# EAGLE board Clock Schematic v.6_one_layer (EAGLE 9.3.0)
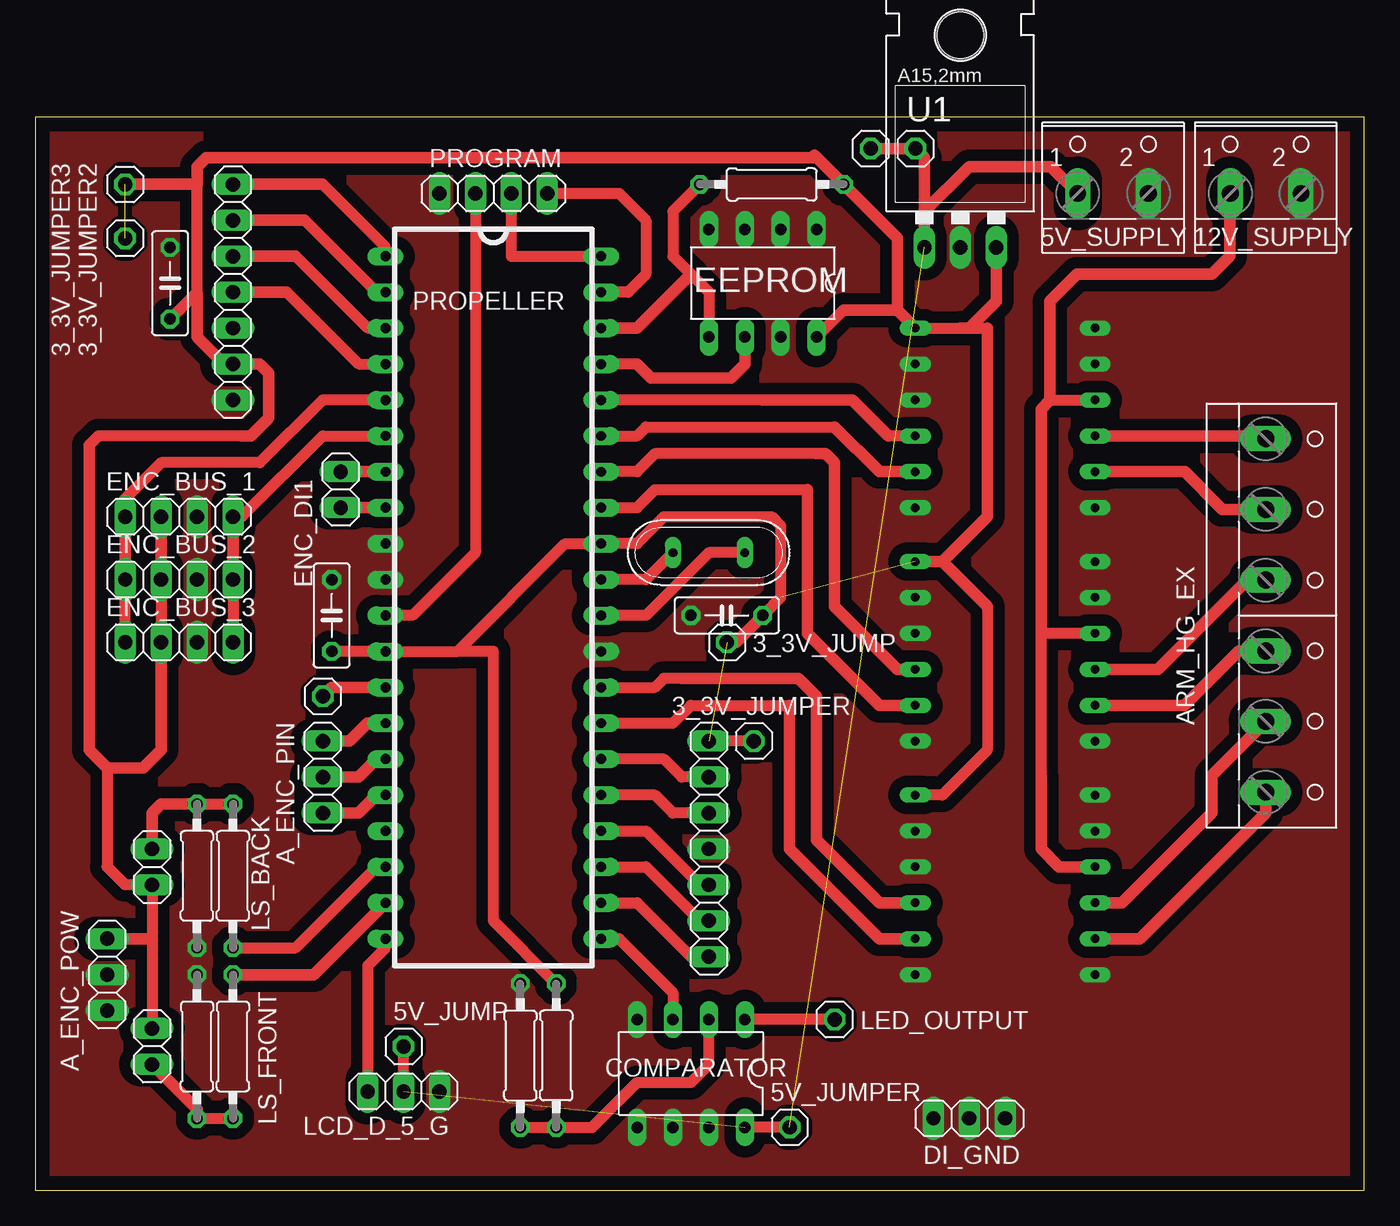
[diagram p0: board, top side]
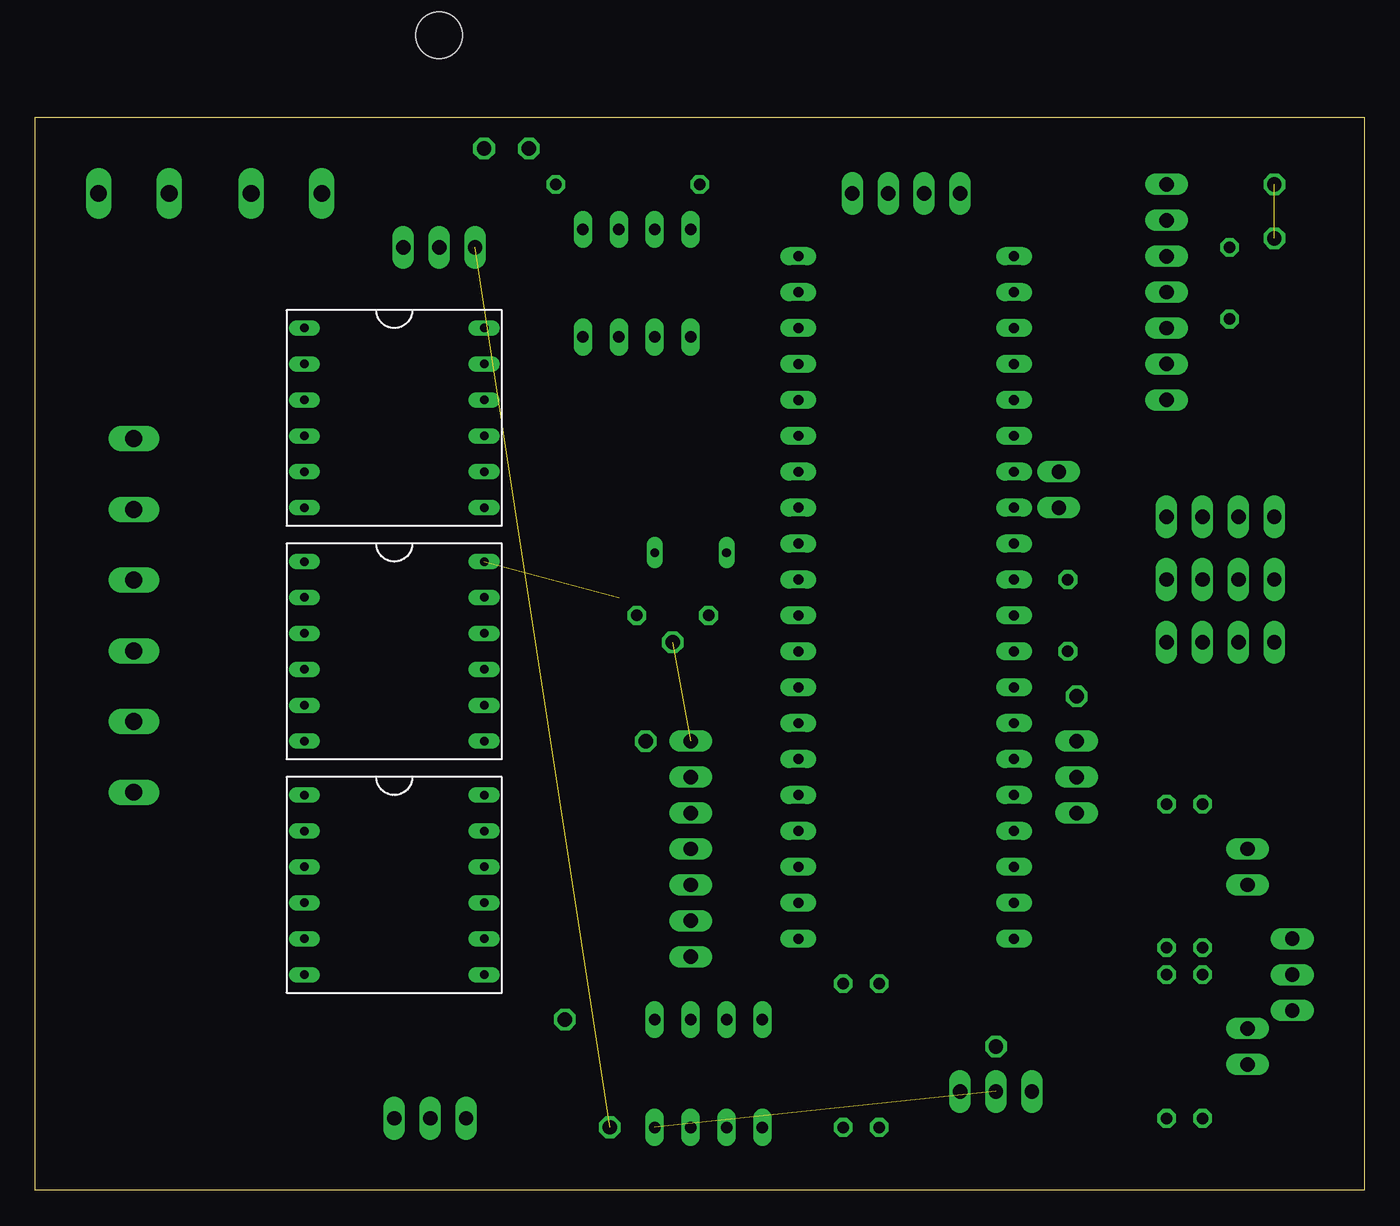
[diagram p1: board, bottom side, seen from below]

Size 93.96 x 75.87 mm. Coordinates in mm from the lower left corner, seen from the top.
Outline: 0,0 93.96,0 93.96,75.87 0,75.87 0,0
Copper layers (1*16): Top 0.035mm / dielectric 1.5mm / Bottom 0.035mm
Design rules "default *": minimum track width 6mil, minimum drill 0.35mm, track to track 30mil, track to pad 6mil, pad to pad 6mil, via to via 6mil, smd to smd 6mil, copper to edge 40mil, drill to drill 6mil, minimum pad ring 10mil, minimum via ring 8mil, stop-mask expansion 4mil, vias tented up to drill 0mil, thermal gap 10mil

## Footprints (pad centres in the part's own frame; a part is rotated, then mirrored left to right if it is on the bottom)
1X01 = drill 1.016 octagon: 1 0,0
W237-102 = drill 1.194 long: 1 -2.5,-1.27; 2 2.5,-1.27
1X03 = drill 1.016 long: 1 -2.54,0; 2 0,0; 3 2.54,0
DRV = drill 0.6 long: P$1 1.27,1.27; P$2 1.27,3.81; P$3 1.27,6.35; P$4 1.27,8.89; P$5 1.27,11.43; P$6 1.27,13.97; P$7 13.97,13.97; P$8 13.97,11.43; P$9 13.97,8.89; P$10 13.97,6.35; P$11 13.97,3.81; P$12 13.97,1.27
W237-6 = drill 1.194 long: 1 -12.5,-1.27; 2 -7.5,-1.27; 3 -2.5,-1.27; 4 2.5,-1.27; 5 7.5,-1.27; 6 12.5,-1.27
C050-025X075 = drill 0.813 octagon: 1 -2.54,0; 2 2.54,0
DIL08 = drill 0.813 long: 1 -3.81,-3.81; 2 -1.27,-3.81; 3 1.27,-3.81; 4 3.81,-3.81; 5 3.81,3.81; 6 1.27,3.81; 7 -1.27,3.81; 8 -3.81,3.81
DIL8 = drill 0.813 long: 1 -3.81,-3.81; 2 -1.27,-3.81; 3 1.27,-3.81; 4 3.81,-3.81; 5 3.81,3.81; 6 1.27,3.81; 7 -1.27,3.81; 8 -3.81,3.81
1X04 = drill 1.016 long: 1 -3.81,0; 2 -1.27,0; 3 1.27,0; 4 3.81,0
1X02 = drill 1.016 long: 1 -1.27,0; 2 1.27,0
1X07 = drill 1.016 long: 1 -7.62,0; 2 -5.08,0; 3 -2.54,0; 4 0,0; 5 2.54,0; 6 5.08,0; 7 7.62,0
P8X32A-D40 = drill 0.7 pad 1.27 long: 1 -7.62,23.495; 2 -7.62,20.955; 3 -7.62,18.415; 4 -7.62,15.875; 5 -7.62,13.335; 6 -7.62,10.795; 7 -7.62,8.255; 8 -7.62,5.715; 9 -7.62,3.175; 10 -7.62,0.635; 11 -7.62,-1.905; 12 -7.62,-4.445; 13 -7.62,-6.985; 14 -7.62,-9.525; 15 -7.62,-12.065; 16 -7.62,-14.605; 17 -7.62,-17.145; 18 -7.62,-19.685; 19 -7.62,-22.225; 20 -7.62,-24.765; 21 7.62,-24.765; 22 7.62,-22.225; 23 7.62,-19.685; 24 7.62,-17.145; 25 7.62,-14.605; 26 7.62,-12.065; 27 7.62,-9.525; 28 7.62,-6.985; 29 7.62,-4.445; 30 7.62,-1.905; 31 7.62,0.635; 32 7.62,3.175; 33 7.62,5.715; 34 7.62,8.255; 35 7.62,10.795; 36 7.62,13.335; 37 7.62,15.875; 38 7.62,18.415; 39 7.62,20.955; 40 7.62,23.495
QS = drill 0.61 long: 1 -2.54,0; 2 2.54,0
0207/10 = drill 0.813 octagon: 1 -5.08,0; 2 5.08,0
78XXL = drill 1.016 long: GND 0,-3.81; IN -2.54,-3.81; OUT 2.54,-3.81 | hole 3.302: 0,11.176

## Placement (x,y rotation side)
3_3V_JUMP  [1X01]  48.9,38.73 0 top
3_3V_JUMPER  [1X01]  50.8,31.75 0 top
3_3V_JUMPER2  [1X01]  6.35,67.31 0 top
3_3V_JUMPER3  [1X01]  6.35,71.12 0 top
5V_JUMP  [1X01]  26.04,10.16 0 top
5V_JUMPER  [1X01]  53.34,4.45 0 top
5V_JUMPER2  [1X01]  59.05,73.66 0 top
5V_JUMPER3  [1X01]  62.23,73.66 0 top
5V_SUPPLY  [W237-102]  76.2,71.75 0 top
12V_SUPPLY  [W237-102]  87,71.75 0 top
A_ENC_PIN  [1X03]  20.32,29.21 270 top
A_ENC_POW  [1X03]  5.08,15.24 270 top
ARM  DRV  [DRV]  76.2,13.97 0 bottom
ARM_HG_EX  [W237-6]  88.27,40.64 270 top
C1  0.1uF  [C050-025X075]  9.53,64.14 90 top
C2  [C050-025X075]  48.9,40.64 180 top
C3  [C050-025X075]  20.95,40.64 90 top
COMPARATOR  MAX907CPA  [DIL08]  46.35,8.26 180 top
DI_GND  [1X03]  66.04,5.08 0 top
EEPROM  24LC256P  [DIL8]  51.44,64.14 180 top
ENC_BUS_1  [1X04]  10.16,47.62 0 top
ENC_BUS_2  [1X04]  10.16,43.18 0 top
ENC_BUS_3  [1X04]  10.16,38.73 0 top
ENC_DI1  [1X02]  21.59,49.53 270 top
EXTEND  DRV  [DRV]  76.2,46.99 0 bottom
HG  DRV  [DRV]  76.2,30.48 0 bottom
JP1  [1X07]  13.97,63.5 270 top
JP3  [1X01]  20.32,34.92 0 top
JS  [1X07]  47.62,24.13 270 top
LCD_D_5_G  [1X03]  26.04,6.99 180 top
LED_OUTPUT  [1X01]  56.52,12.06 0 top
LS_BACK  [1X02]  8.26,22.86 90 top
LS_FRONT  [1X02]  8.26,10.16 270 top
PROGRAM  [1X04]  32.38,70.48 0 top
PROPELLER  P8X32A-D40  [P8X32A-D40]  32.38,42.55 0 top
Q1  [QS]  47.62,45.09 180 top
R1  [0207/10]  36.83,9.53 90 top
R2  [0207/10]  34.29,9.53 270 top
R3  10k  [0207/10]  11.43,10.16 270 top
R4  470  [0207/10]  13.97,10.16 270 top
R5  10k  [0207/10]  11.43,22.23 90 top
R6  470  [0207/10]  13.97,22.23 90 top
R7  10k  [0207/10]  52.07,71.12 0 top
U1  [78XXL]  65.41,70.48 0 top

## Library data of the parts
3_3V_JUMP 3_3V_JUMPER 3_3V_JUMPER2 3_3V_JUMPER3 5V_JUMP 5V_JUMPER 5V_JUMPER2 5V_JUMPER3 A_ENC_PIN A_ENC_POW DI_GND ENC_BUS_1-ENC_BUS_3 ENC_DI1 JP1 JP3 JS LCD_D_5_G LED_OUTPUT LS_BACK LS_FRONT PROGRAM = pinhead
5V_SUPPLY 12V_SUPPLY = con-wago-500; MPN: 237-102; OC_FARNELL: unknown; OC_NEWARK: 70K9898
ARM EXTEND HG = Pololu_DRV8801_Breakout
ARM_HG_EX = con-wago-500; OC_FARNELL: unknown; OC_NEWARK: unknown
C1-C3 = rcl; SPICEPREFIX: C
COMPARATOR = maxim; MF: MAXIM; MPN: MAX907CPA; OC_FARNELL: unknown; OC_NEWARK: 79C3004; SPICEPREFIX: X
EEPROM = microchip; MF: MICROCHIP; MPN: 24LC256-E/P; OC_FARNELL: 9757970; OC_NEWARK: 92C7169
PROPELLER = parallax_propeller
Q1 = special
R1-R7 = rcl; SPICEPREFIX: R
U1 = SparkFun-IC-Power

## Nets
+3V3: 3_3V_JUMP.1 3_3V_JUMPER2.1 3_3V_JUMPER3.1 3_3V_JUMPER.1 A_ENC_POW.1 ARM.P$7 C1.1 C2.1 C3.1 EEPROM.8 ENC_BUS_1.2 ENC_BUS_2.2 ENC_BUS_3.2 EXTEND.P$7 HG.P$7 JP1.6 JS.1 LS_BACK.1 LS_FRONT.1 PROPELLER.12 PROPELLER.32 R1.2 R7.2 U1.OUT
+5V: 5V_JUMP.1 5V_JUMPER2.1 5V_JUMPER3.1 5V_JUMPER.1 5V_SUPPLY.1 COMPARATOR.8 LCD_D_5_G.2 U1.IN
+12V: 12V_SUPPLY.1 ARM.P$4 EXTEND.P$4 HG.P$4
ENC_CLK: ENC_BUS_1.4 ENC_BUS_2.4 ENC_BUS_3.4 PROPELLER.6
ENC_CS: ENC_BUS_1.1 ENC_BUS_2.1 ENC_BUS_3.1 PROPELLER.5
GND: 5V_SUPPLY.2 12V_SUPPLY.2 A_ENC_POW.2 A_ENC_POW.3 ARM.P$1 ARM.P$5 ARM.P$6 ARM.P$8 ARM.P$9 ARM.P$12 C1.2 C2.2 C3.2 COMPARATOR.4 COMPARATOR.5 COMPARATOR.6 COMPARATOR.7 DI_GND.1 DI_GND.2 DI_GND.3 EEPROM.1 EEPROM.2 EEPROM.3 EEPROM.4 EEPROM.7 ENC_BUS_1.3 ENC_BUS_2.3 ENC_BUS_3.3 EXTEND.P$1 EXTEND.P$5 EXTEND.P$6 EXTEND.P$8 EXTEND.P$9 EXTEND.P$12 HG.P$1 HG.P$5 HG.P$6 HG.P$8 HG.P$9 HG.P$12 JP1.7 JS.4 LCD_D_5_G.1 PROGRAM.1 PROPELLER.9 PROPELLER.10 PROPELLER.29 R2.1 R3.1 R5.1 U1.GND
N$1: ENC_DI1.1 PROPELLER.7
N$2: JS.5 PROPELLER.24
N$3: JS.6 PROPELLER.23
N$4: JS.7 PROPELLER.22
N$5: JS.3 PROPELLER.25
N$6: JS.2 PROPELLER.26
N$7: LCD_D_5_G.3 PROPELLER.20
N$8: ENC_DI1.2 PROPELLER.8
N$9: COMPARATOR.1 LED_OUTPUT.1
N$10: PROPELLER.31 Q1.2
N$11: COMPARATOR.2 R1.1 R2.2
N$12: PROPELLER.30 Q1.1
N$13: PROPELLER.19 R4.1
N$14: LS_BACK.2 R5.2 R6.2
N$15: PROPELLER.18 R6.1
N$16: EEPROM.6 PROPELLER.37
N$17: ARM.P$11 PROPELLER.27
N$18: PROGRAM.4 PROPELLER.39
N$19: PROGRAM.3 PROPELLER.40
N$20: EEPROM.5 PROPELLER.38 R7.1
N$21: COMPARATOR.3 PROPELLER.21
N$22: ARM.P$10 PROPELLER.28
N$23: HG.P$11 PROPELLER.33
N$24: HG.P$10 PROPELLER.34
N$25: EXTEND.P$11 PROPELLER.35
N$26: PROGRAM.2 PROPELLER.11
N$27: LS_FRONT.2 R3.2 R4.2
N$28: EXTEND.P$10 PROPELLER.36
N$29: ARM_HG_EX.1 EXTEND.P$3
N$30: ARM_HG_EX.2 EXTEND.P$2
N$31: ARM_HG_EX.3 HG.P$3
N$32: ARM_HG_EX.4 HG.P$2
N$33: ARM.P$3 ARM_HG_EX.5
N$34: ARM.P$2 ARM_HG_EX.6
N$35: JP3.1 PROPELLER.13
N$36: A_ENC_PIN.1 PROPELLER.14
N$37: A_ENC_PIN.2 PROPELLER.15
N$38: A_ENC_PIN.3 PROPELLER.16
RTC_CLK: JP1.4 PROPELLER.4
RTC_CS: JP1.1 PROPELLER.1
RTC_SI: JP1.2 PROPELLER.2
RTC_SO: JP1.3 PROPELLER.3

## Tracks (layer width: path | path; a pad name or v marks a point on that pad's centre or on a via)
+3V3  (3 unrouted)
  Top 0.762: C3.1 PROPELLER.12 29.84,38.1 | EXTEND.P$7 65.41,60.96 67.31,60.96 | 67.31,41.27 67.31,31.11 64.14,27.94 ARM.P$7 | LS_FRONT.1 8.26,17.78 LS_BACK.1 6.35,21.59 5.08,22.86 5.08,29.84 | 29.84,38.1 37.47,45.72 PROPELLER.32 42.55,45.72 44.45,47.62 52.07,47.62 52.7,46.99 52.7,41.91 C2.1 | 11.43,63.5 11.43,62.87 | 11.43,63.5 11.43,71.12 | C1.1 11.43,63.5 | 14.61,53.34 4.45,53.34 3.81,52.7 | R1.2 32.38,19.05 32.38,38.1 29.84,38.1 | 3_3V_JUMPER.1 JS.1 | EEPROM.8 57.15,62.23 | ENC_BUS_2.2 ENC_BUS_3.2
  Top 0.813: HG.P$7 64.14,44.45 | 64.14,44.45 67.31,41.27 | 67.31,60.96 67.31,47.62 64.14,44.45 | U1.OUT 67.94,62.87 66.04,60.96 65.41,60.96 | 57.15,62.23 60.96,62.23 | 60.96,62.23 EXTEND.P$7 | 60.96,62.23 60.96,67.31 R7.2 55.09,73.18 54.94,73.03 12.06,73.03 11.43,72.39 11.43,71.12 3_3V_JUMPER3.1 | C2.1 49.53,38.73 3_3V_JUMP.1 | 11.43,62.87 11.43,60.33 13.34,58.42 JP1.6 15.88,58.42 16.51,57.78 16.51,54.61 15.24,53.34 14.61,53.34 | A_ENC_POW.1 8.26,17.78 | 3.81,52.7 3.81,31.11 5.08,29.84 7.62,29.84 8.89,31.11 ENC_BUS_3.2 | ENC_BUS_2.2 ENC_BUS_1.2
+5V  (2 unrouted)
  Top 0.762: 5V_JUMPER.1 COMPARATOR.8 | LCD_D_5_G.2 5V_JUMP.1
  Top 0.813: 5V_SUPPLY.1 71.8,72.39 66.04,72.39 62.87,69.22 U1.IN 62.87,73.03 5V_JUMPER3.1 5V_JUMPER2.1
+12V
  Top 0.762: 71.75,55.88 EXTEND.P$4 | HG.P$4 71.12,39.37 71.12,29.21
  Top 0.813: ARM.P$4 72.39,22.86 71.12,24.13 71.12,29.21 | 12V_SUPPLY.1 84.45,70.44 84.45,66.04 83.19,64.77 73.66,64.77 71.75,62.87 71.75,55.88 71.12,55.24 71.12,39.37
ENC_CLK
  Top 0.762: PROPELLER.6 20.32,53.34 14.61,47.62 ENC_BUS_1.4 | ENC_BUS_2.4 ENC_BUS_3.4
  Top 0.813: ENC_BUS_1.4 ENC_BUS_2.4
ENC_CS
  Top 0.762: PROPELLER.5 20.32,55.88 15.88,51.44 8.89,51.44 6.35,48.9 ENC_BUS_1.1 | ENC_BUS_3.1 ENC_BUS_2.1
  Top 0.813: ENC_BUS_1.1 ENC_BUS_2.1
GND
  pour Top (isolate 0.813, no thermals): 0.64,74.93 92.71,74.93 92.71,0.64 0.64,0.64
N$1
  Top 0.813: ENC_DI1.1 PROPELLER.7
N$2
  Top 0.762: PROPELLER.24 43.18,25.4 46.99,21.59 JS.5
N$3
  Top 0.762: JS.6 46.99,19.05 43.18,22.86 PROPELLER.23
N$4
  Top 0.762: JS.7 46.35,16.51 42.55,20.32 PROPELLER.22
N$5
  Top 0.762: JS.3 45.09,26.67 43.81,27.94 PROPELLER.25
N$6
  Top 0.762: JS.2 45.72,29.21 44.45,30.48 PROPELLER.26
N$7
  Top 0.762: PROPELLER.20 24.77,17.14 23.5,15.88 LCD_D_5_G.3
N$8
  Top 0.813: PROPELLER.8 ENC_DI1.2
N$9
  Top 0.762: LED_OUTPUT.1 COMPARATOR.1
N$10
  Top 0.762: Q1.2 43.18,43.18 PROPELLER.31
N$11
  Top 0.762: R2.2 R1.1 39.37,4.45 42.55,7.62 46.35,7.62 47.62,8.89 COMPARATOR.2
N$12
  Top 0.762: Q1.1 47.62,45.09 43.18,40.64 PROPELLER.30
N$13
  Top 0.813: PROPELLER.19 19.68,15.24 R4.1
N$14
  Top 0.762: R5.2 R6.2
  Top 0.813: R5.2 8.89,27.3 8.26,26.67 LS_BACK.2
N$15
  Top 0.762: R6.1 18.41,17.14 24.13,22.86 PROPELLER.18
N$16
  Top 0.762: 42.55,58.42 PROPELLER.37
  Top 0.813: EEPROM.6 50.16,58.42 49.17,57.43 43.54,57.43 42.55,58.42
N$17
  Top 0.762: PROPELLER.27 45.09,33.02 46.35,34.29 53.34,34.29
  Top 0.813: 53.34,34.29 53.34,24.13 59.69,17.78 ARM.P$11
N$18
  Top 0.762: PROGRAM.4 41.27,70.48 43.18,68.58 43.18,64.77 41.91,63.5 PROPELLER.39
N$19
  Top 0.762: PROGRAM.3 33.66,66.04 PROPELLER.40
N$20
  Top 0.762: R7.1 45.09,69.22 45.09,66.04 46.35,64.77 47.62,63.5 EEPROM.5
  Top 0.813: PROPELLER.38 42.55,60.96 46.35,64.77
N$21
  Top 0.762: PROPELLER.21 41.27,17.78 45.09,13.97 COMPARATOR.3
N$22
  Top 0.762: PROPELLER.28 43.81,35.56 44.45,36.2 45.72,36.2
  Top 0.813: ARM.P$10 59.69,20.32 55.24,24.77 55.24,34.92 53.98,36.2 45.72,36.2
N$23
  Top 0.762: PROPELLER.33 42.55,48.26 43.81,49.53 54.61,49.53
  Top 0.813: 54.61,49.53 54.61,39.37 59.69,34.29 HG.P$11
N$24
  Top 0.762: 55.24,52.07 43.81,52.07 42.55,50.8 PROPELLER.34
  Top 0.813: HG.P$10 60.96,36.83 56.52,41.27 56.52,51.44 55.88,52.07 55.24,52.07
N$25
  Top 0.762: PROPELLER.35 42.55,53.34 43.18,53.98 56.52,53.98
  Top 0.813: 56.52,53.98 59.69,50.8 EXTEND.P$11
N$26
  Top 0.762: PROGRAM.2 31.11,45.09 26.67,40.64 PROPELLER.11
N$27
  Top 0.762: R3.2 R4.2
  Top 0.813: R3.2 11.43,5.71 LS_FRONT.2
N$28
  Top 0.762: EXTEND.P$10 60.33,53.34 | 51.44,55.88 PROPELLER.36
  Top 0.813: 60.33,53.34 57.78,55.88 51.44,55.88
N$29
  Top 0.813: EXTEND.P$3 86.8,53.34 ARM_HG_EX.1
N$30
  Top 0.813: ARM_HG_EX.2 83.94,48.14 81.28,50.8 EXTEND.P$2
N$31
  Top 0.813: ARM_HG_EX.3 85.69,43.14 79.38,36.83 HG.P$3
N$32
  Top 0.813: ARM_HG_EX.4 85.09,38.14 81.24,34.29 HG.P$2
N$33
  Top 0.813: ARM_HG_EX.5 83.19,29.33 83.19,26.67 76.83,20.32 ARM.P$3
N$34
  Top 0.813: ARM.P$2 78.11,17.78 87,26.67 ARM_HG_EX.6
N$35
  Top 0.813: JP3.1 20.95,35.56 PROPELLER.13
N$36
  Top 0.813: A_ENC_PIN.1 22.23,31.75 23.5,33.02 PROPELLER.14
N$37
  Top 0.813: A_ENC_PIN.2 22.86,29.21 24.13,30.48 PROPELLER.15
N$38
  Top 0.813: A_ENC_PIN.3 22.86,26.67 24.13,27.94 PROPELLER.16
RTC_CLK
  Top 0.762: 17.78,63.5 22.86,58.42 PROPELLER.4
  Top 0.813: JP1.4 17.78,63.5
RTC_CS
  Top 0.762: 20.32,71.12 24.77,66.67 PROPELLER.1
  Top 0.813: JP1.1 20.32,71.12
RTC_SI
  Top 0.762: PROPELLER.2 24.13,63.5 19.05,68.58
  Top 0.813: 19.05,68.58 JP1.2
RTC_SO
  Top 0.762: 18.41,66.04 23.5,60.96 PROPELLER.3
  Top 0.813: JP1.3 18.41,66.04